# Altium PCB PANEL_PCB_Project.PcbDoc
Units mm, origin at the board's own origin, x right, y up, seen from the top; angles counter-clockwise.
Board outline 423 x 200 mm, 2 copper layers (Top Layer, Bottom Layer); 8 components, 0 nets, 8 pads, 0 vias.
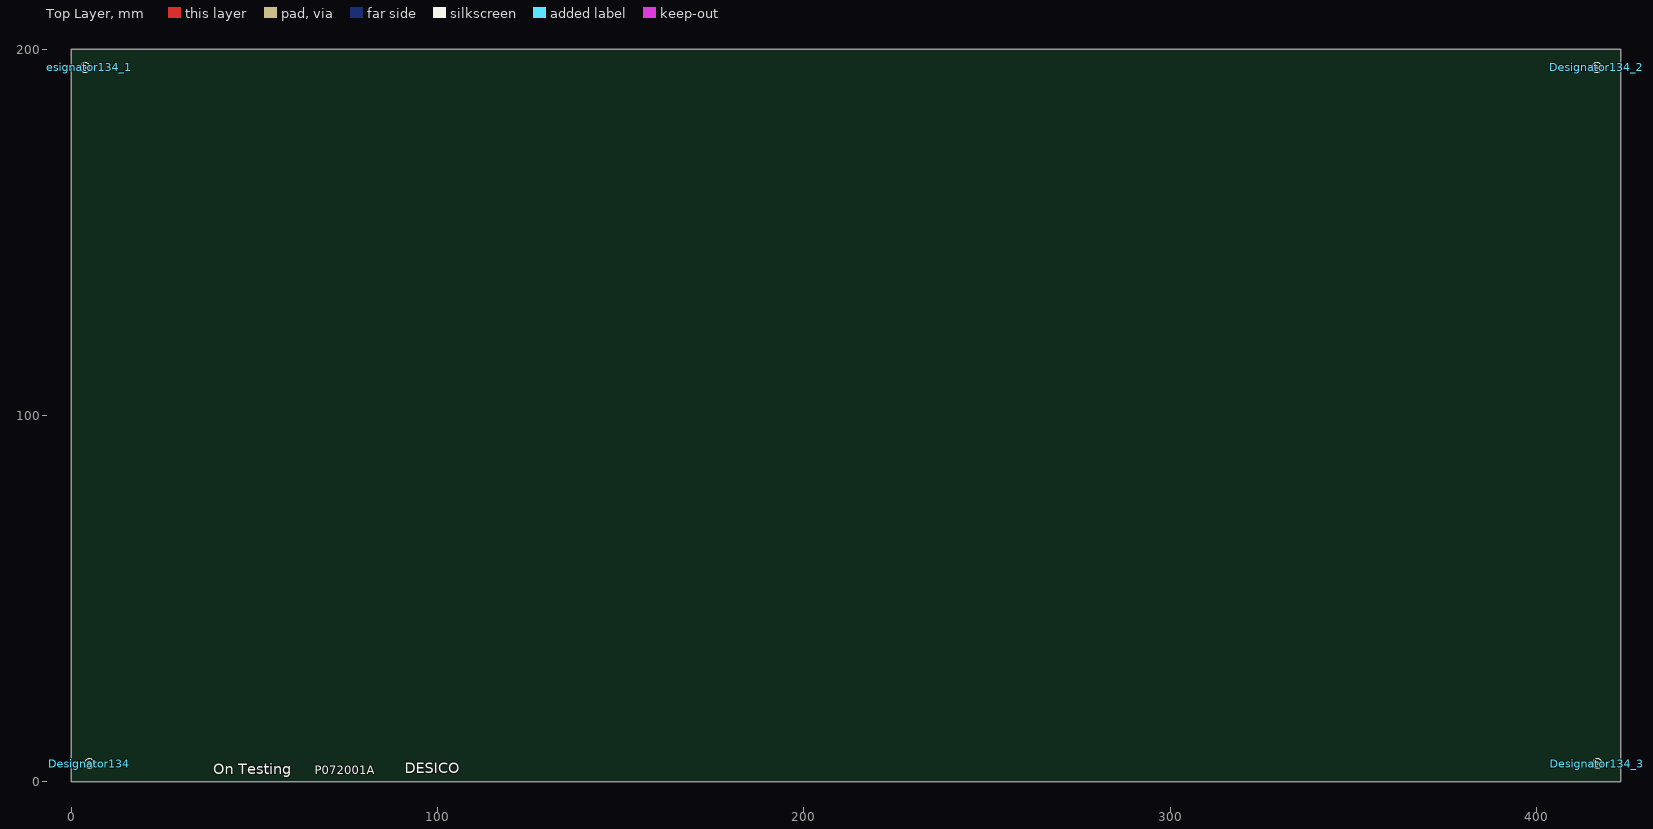
[diagram p0: Top Layer view]
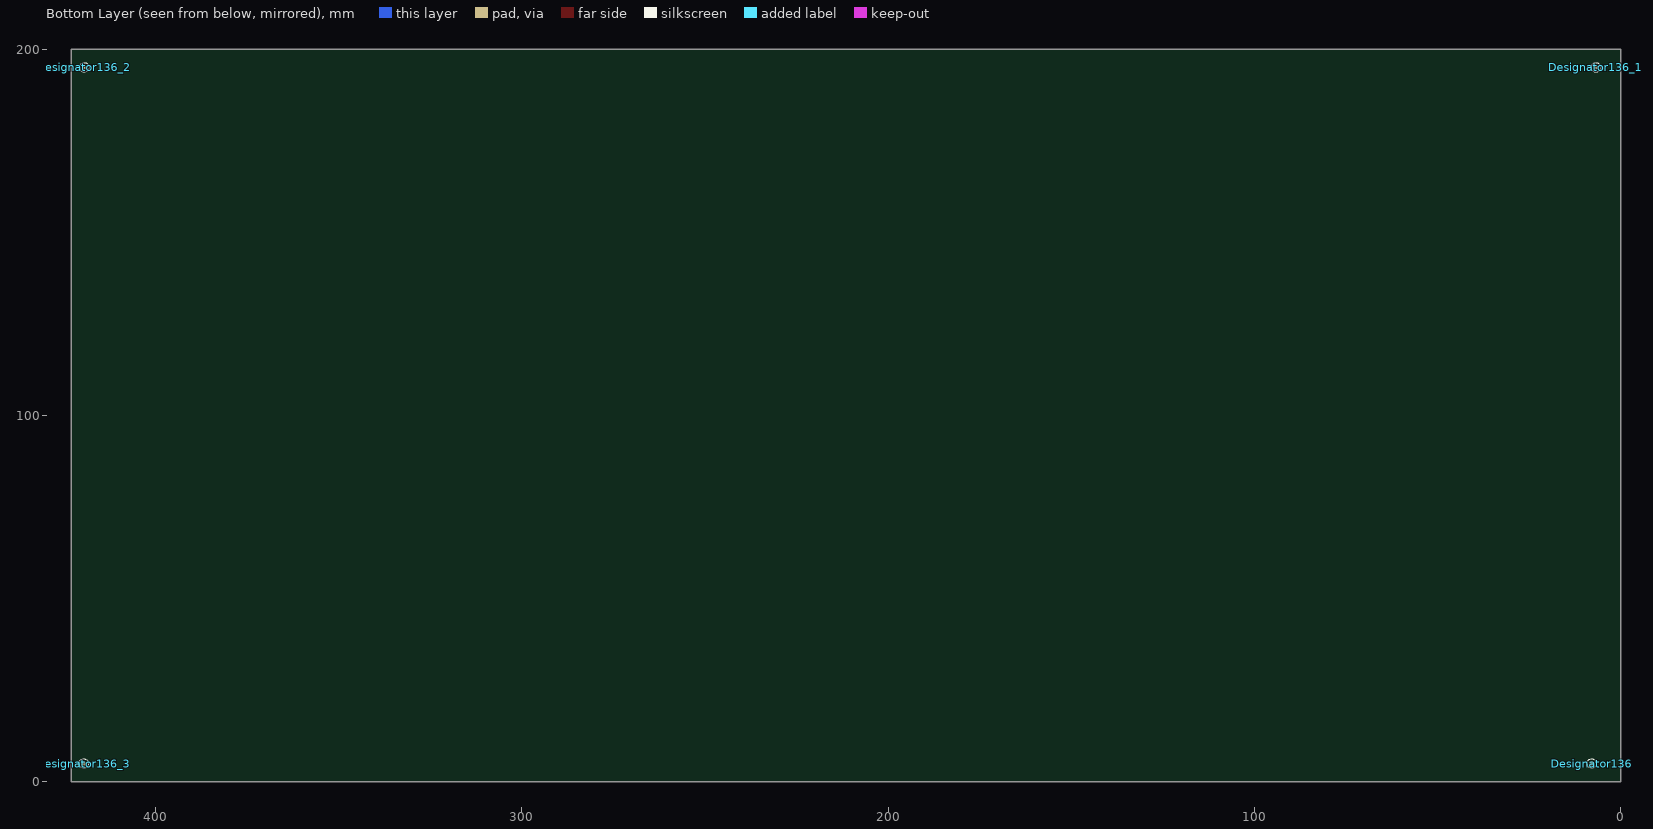
[diagram p1: Bottom Layer view, seen from below]

## Layer stack, top to bottom
Top Solder: solder mask 0.0102, Solder Resist, Dk 3.5
Top Layer: signal copper 0.035
Dielectric 1: dielectric 0.32, FR-4, Dk 4.8
Bottom Layer: signal copper 0.035
Bottom Solder: solder mask 0.0102, Solder Resist, Dk 3.5

## Board outline
0,0 0,200 423,200 423,0

## Design rules (kind name [scope] priority, off if disabled: settings)
Clearance [All] p1: gap=0.254 ignorepadtopadclearanceinfootprint=FALSE except(0: Arc-Hole Track-Hole SMDPad-Hole THPad-Hole Via-Hole Fill-Hole Poly-Hole Region-Hole Text-Hole)
PolygonConnect [All] p1: connectstyle=Relief reliefconductorwidth=0.254 reliefentries=4 polygonreliefangle="90 Angle" airgapwidth=0.254
RoutingVias [All] p1: holewidth=0.711 width=1.27 viastyle="Through Hole" minholewidth=0.711 minwidth=1.27 maxholewidth=0.711 maxwidth=1.27
SolderMaskExpansion [All] p1: expansion=0.102 istentingtop=FALSE
Width [All] p1: maxlimit=0.254 minlimit=0.254 preferedwidth=0.254
30 further rules are at their usual default settings.

## Components (designator, comment, footprint, x,y, rotation, side; value= is the part's Value field where it differs from the comment)
Designator134 "Comment" FID_R1.2mm 5,5 r180 top
Designator134_1 "Comment" FID_R1.2mm 3.8,195 r180 top
Designator134_2 "Comment" FID_R1.2mm 416.4,195 r180 top
Designator134_3 "Comment" FID_R1.2mm 416.6,5 r180 top
Designator136 "Comment" FID_R1.2mm 8,5 r0 bottom
Designator136_1 "Comment" FID_R1.2mm 6.8,195 r0 bottom
Designator136_2 "Comment" FID_R1.2mm 419.4,195 r0 bottom
Designator136_3 "Comment" FID_R1.2mm 419.6,5 r0 bottom

## Footprints (in the part's own frame and the unit in brackets; to place one, negate y for a bottom-side part, rotate by r counter-clockwise, add the part's x,y. Pads: shape width x height; smd on the part's side, far side on the other; paste and mask are expansions set on the pad)
FID_R1.2mm [mm] "Fiducial, Round, D=1.2mm."
  round 1.2 smd mask+0.5: FID(0,0)
  Top Layer pour cut-out: -1.4,1.4 1.4,1.4 1.4,-1.4 -1.4,-1.4
  silkscreen extent -1.3,-1.3 1.3,1.3

## Nets (pads, with @x,y where several pads share a name; then routed paths per layer and width w, separated by ;. In a path a pad name is that pad's centre, name@x,y a point inside that pad or via, vN(x,y) a via of type N, cw(c..) or ccw(c..) an arc to the next point about the centre after c; other vN are vias at no path point)
pads on no net: Designator134.FID Designator134_1.FID Designator134_2.FID Designator134_3.FID Designator136.FID Designator136_1.FID Designator136_2.FID Designator136_3.FID

## Silkscreen, mask and mechanical layers (free items; w line width, h text height)
Top Overlay:
  text "DESICO" at 91,1.4 h5
  text "P072001A" at 66.5,1.3 h4
  text "On Testing" at 38.8,1.1 h5
Board Outline:
  the board outline again, w0.254
Fab Notes (Mech9):
  lines w0.254: 0,9.975 423,10 ; 0,99.975 423,100 ; 0,189.975 423,190 ; 10,0 10,200 ; 376,0.024 376,200.024 ; 413,-0.001 413,199.999

## Panel: embedded boards
"Single_DESICO_DSE00507_main_RevA.PcbDoc" at 10,9.975, 2 rows x 1 columns, spacing 90 x 403, rotation 0